# Altium PCB PCB.PcbDoc
Units mm, origin at the board's own origin, x right, y up, seen from the top; angles counter-clockwise.
Board outline 39.6 x 28 mm, 2 copper layers (Top Layer, Bottom Layer), stack 1.581 mm thick; 14 components, 13 nets, 92 pads, 24 vias.
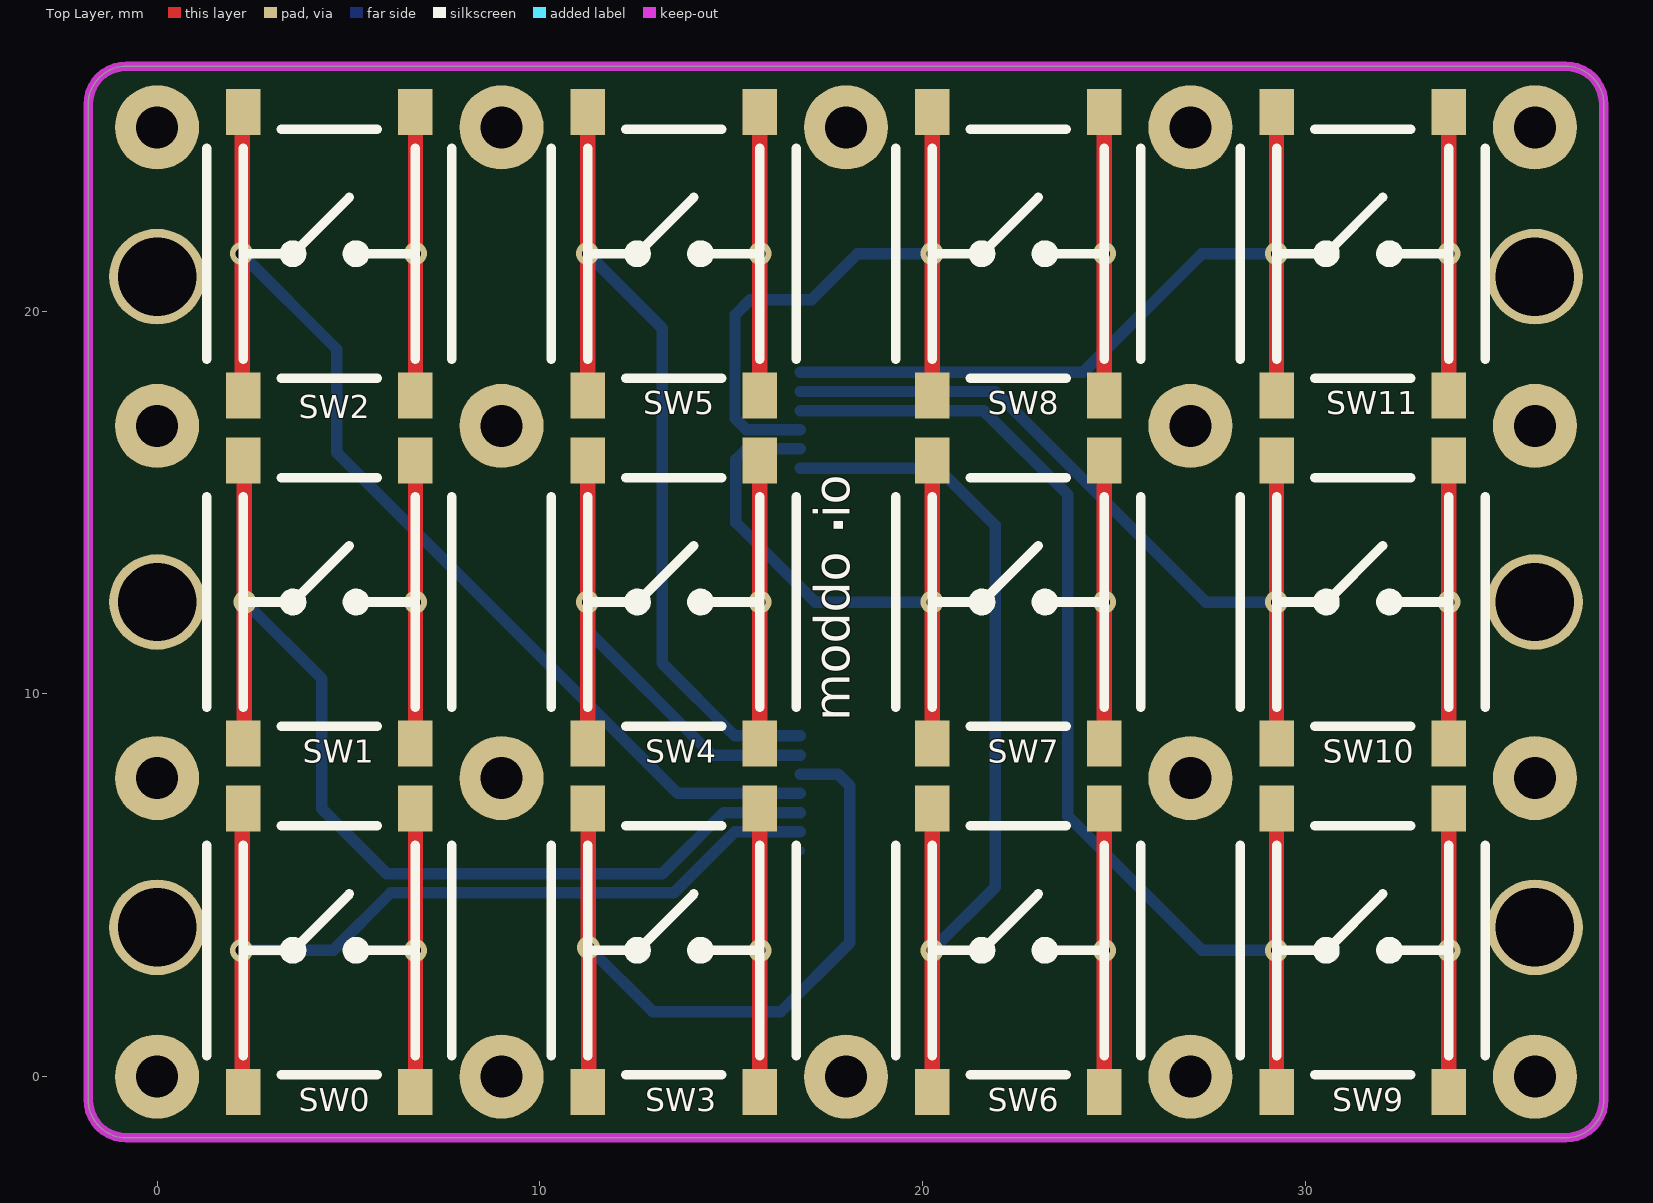
[diagram p0: Top Layer view]
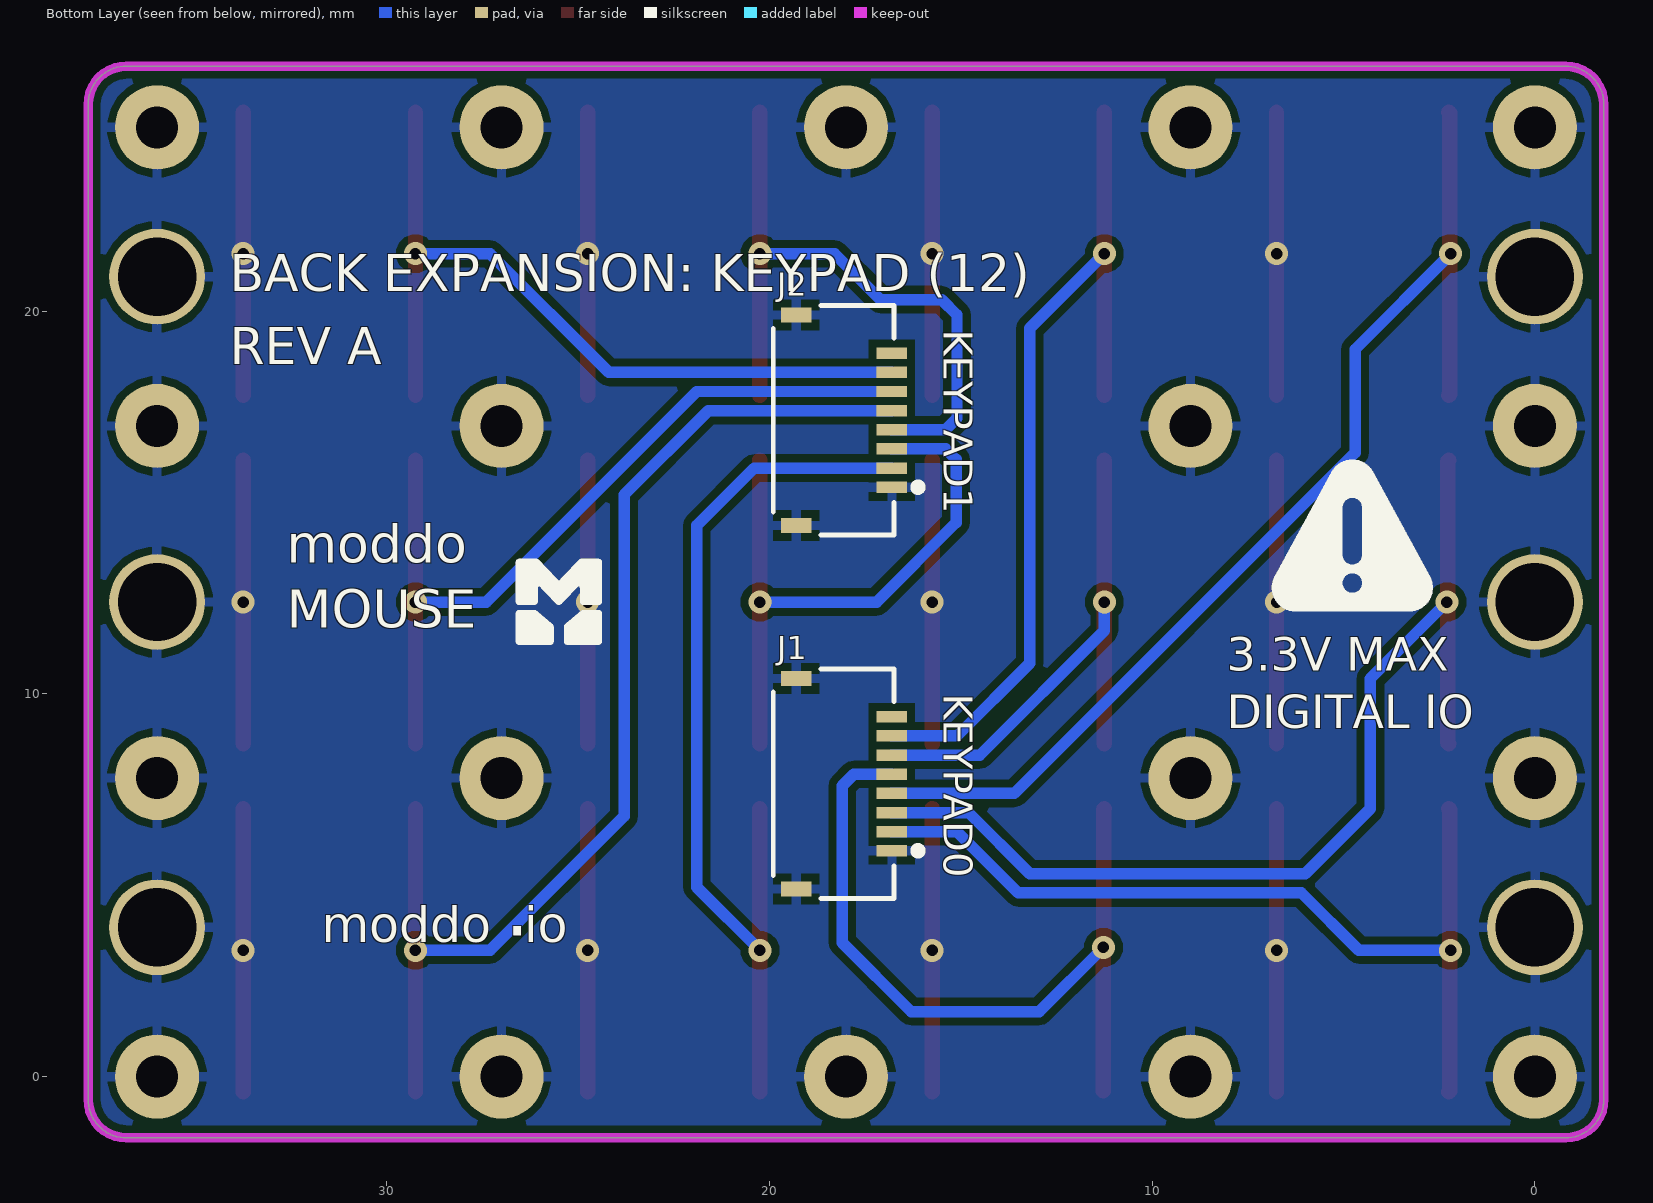
[diagram p1: Bottom Layer view, seen from below]
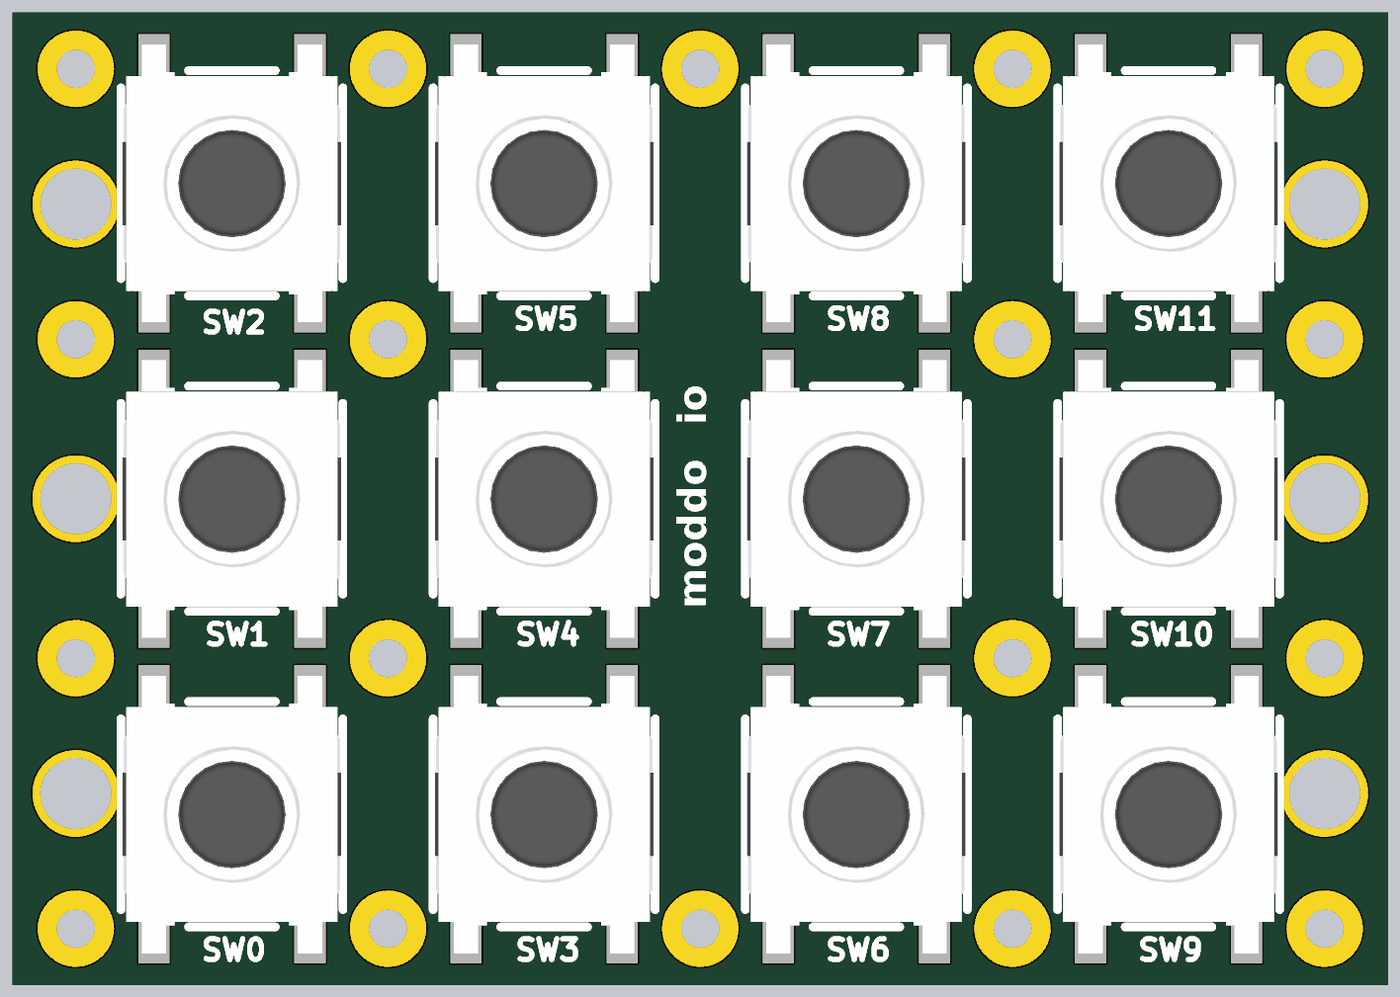
[diagram p2: 3D render of the assembled board from above, using the file's embedded part models]

## Layer stack, top to bottom
Top Solder: solder mask 0.0102, Solder Resist, Dk 3.5
Top Layer: signal copper 0.0356
Dielectric 1: dielectric 1.51, FR-4, Dk 4.8
Bottom Layer: signal copper 0.0356
Bottom Solder: solder mask 0.0102, Solder Resist, Dk 3.5

## Board outline
-1.8,-0.6 -1.8,25.4 cw(c-0.8,25.4) -0.8,26.4 36.8,26.4 cw(c36.8,25.4) 37.8,25.4 37.8,-0.6 cw(c36.8,-0.6) 36.8,-1.6 -0.8,-1.6 cw(c-0.8,-0.6)

## Design rules (kind name [scope] priority, off if disabled: settings)
BoardOutlineClearance [All] p1: gap=0.2 ignorepadtopadclearanceinfootprint=FALSE
Clearance GND_bot [InNamedPolygon('GND_bot')] p1: gap=0.2 ignorepadtopadclearanceinfootprint=FALSE
Clearance GND_top [InNamedPolygon('GND_top')] p2: gap=0.1 ignorepadtopadclearanceinfootprint=FALSE
Clearance [All] p3: gap=0.2 ignorepadtopadclearanceinfootprint=FALSE
HoleSize [All] p1: absolutevalues=TRUE maxlimit=20 minlimit=0.025 maxpercent=80.000 minpercent=20.000
MinimumSolderMaskSliver [All] p1: minsoldermaskwidth=0.05
PolygonConnect [All] p1: thpad.connectstyle=Relief thpad.reliefconductorwidth=0.254 thpad.reliefentries=4 thpad.polygonreliefangle="90 Angle" thpad.airgapwidth=0.2 smdpad.connectstyle=Relief smdpad.reliefconductorwidth=0.254 smdpad.reliefentries=4 smdpad.polygonreliefangle="90 Angle" smdpad.airgapwidth=0.2 via.connectstyle=Direct via.reliefconductorwidth=0.254 via.reliefentries=4 via.polygonreliefangle="90 Angle" via.airgapwidth=0.254
RoutingVias [All] p1: holewidth=0.3 width=0.4 viastyle="Through Hole" minholewidth=0.3 minwidth=0.4 maxholewidth=2 maxwidth=10
SilkToSilkClearance [All] p1: silktosilkclearance=0.01
SilkToSolderMaskClearance [IsPad] p1: minsilkscreentomaskgap=0.001 clearancetoexposedcopper=TRUE
SolderMaskExpansion [All] p1: expansion=0.05 istentingtop=FALSE
SupplyNets "Schematic Supply Nets_1" [InNet('GND')] p1: voltage=0.000
UnRoutedNet [All] p1: checkbadconnections=TRUE
Width [All] p1: maxlimit=2.54 minlimit=0.089 preferedwidth=0.254
25 further rules are at their usual default settings.

## Components (designator, comment, footprint, x,y, rotation, side; value= is the part's Value field where it differs from the comment)
J1 "2328702-8" 2328702-8 20.15,7.65 r270 bottom
J2 "2328702-8" 2328702-8 20.15,17.15 r270 bottom
SW0 "GT-TS090C-H031-L5" Switch_6_2mm_6_2mm_3_1mm 4.5,3.3 r90 top
SW1 "GT-TS090C-H031-L5" Switch_6_2mm_6_2mm_3_1mm 4.5,12.4 r90 top
SW2 "GT-TS090C-H031-L5" Switch_6_2mm_6_2mm_3_1mm 4.5,21.5 r90 top
SW3 "GT-TS090C-H031-L5" Switch_6_2mm_6_2mm_3_1mm 13.5,3.3 r90 top
SW4 "GT-TS090C-H031-L5" Switch_6_2mm_6_2mm_3_1mm 13.5,12.4 r90 top
SW5 "GT-TS090C-H031-L5" Switch_6_2mm_6_2mm_3_1mm 13.5,21.5 r90 top
SW6 "GT-TS090C-H031-L5" Switch_6_2mm_6_2mm_3_1mm 22.5,3.3 r90 top
SW7 "GT-TS090C-H031-L5" Switch_6_2mm_6_2mm_3_1mm 22.5,12.4 r90 top
SW8 "GT-TS090C-H031-L5" Switch_6_2mm_6_2mm_3_1mm 22.5,21.5 r90 top
SW9 "GT-TS090C-H031-L5" Switch_6_2mm_6_2mm_3_1mm 31.5,3.3 r90 top
SW10 "GT-TS090C-H031-L5" Switch_6_2mm_6_2mm_3_1mm 31.5,12.4 r90 top
SW11 "GT-TS090C-H031-L5" Switch_6_2mm_6_2mm_3_1mm 31.5,21.5 r90 top

## Footprints (in the part's own frame and the unit in brackets; to place one, negate y for a bottom-side part, rotate by r counter-clockwise, add the part's x,y. Pads: shape width x height; smd on the part's side, far side on the other; paste and mask are expansions set on the pad)
2328702-8 [mm]
  rect 0.3x0.8 smd mask+0.05: 1(1.75,3.35) 2(1.25,3.35) 3(0.75,3.35) 4(0.25,3.35) 5(-0.25,3.35) 6(-0.75,3.35) 7(-1.25,3.35) 8(-1.75,3.35)
  rect 0.4x0.8 smd mask+0.05: S1(2.75,0.85) S2(-2.75,0.85)
  silkscreen extent -3,0.25 3,4.13, body extent -3,0.25 3,4.08, height 1.06
Switch_6_2mm_6_2mm_3_1mm [mm]
  rect 1.2x0.9 smd mask+0.05: 1(-3.7,2.25) 2(3.7,2.25) 3(-3.7,-2.25) 4(3.7,-2.25)
  silkscreen extent -3.25,-3.2 3.25,3.2, body extent -4.01,-3.15 4,3.15, height 3.1

## Part data
J1 J2: "FFC/FPC Connector, 8 Contact(s), 1 Row(s), Right Angle, Solder Terminal, Natural Insulator", Actuator Color=Black, Flammability Rating="UL94 V-0", Housing Color=Natural, Manufacturer="TE Connectivity", Max Operating Temperature=85°C, Min Operating Temperature=-40°C, Operating Supply Voltage=50V, Actuator Material=Thermoplastic, Category="FFC / FPC", ComponentLink1Description=https://www.te.com/commerce/DocumentDelivery/DDEController?Action=srchrtrv&amp;DocNm=2328702&amp;DocType=Customer+Drawing&amp;DocLang=English&src-supplier=Digikey, ComponentLink1URL=https://www.te.com/commerce/DocumentDelivery/DDEController?Action=srchrtrv&amp;DocNm=2328702&amp;DocType=Customer+Drawing&amp;DocLang=English&src-supplier=Digikey, Connector System=Wire-to-Board, Contact Material="Copper Alloy", Contact Plating=Gold, Gender=Receptacle, Height=1mm, Housing Material=Thermoplastic, Length=6mm, Manufacturer Part Number=2328702-8, Mounting Technology="Surface Mount", Number of Contacts=8, Number of Positions=8, Number of Rows=1, Orientation="Right Angle", Packaging="Cut Tape", Plating=Gold, Pricing 1="28000=0.0961 (USD)", RoHS=Yes, Sealable="No (Without)", Series=-, Stock 1=56000, Supplier 1="Arrow Electronics", Supplier Part Number 1=2328702-8, Termination=Solder, Voltage Rating=50V
SW0 SW1 SW2 SW3 SW4 SW5 SW6 SW7 SW8 SW9 SW10 SW11: "Tactile Switch SPST 100gf 3.1mm SMD (SMT) Tab 6.2mm x 6.2mm Surface Mount", Manufacturer=G-Switch, Manufacturer Part Number=GT-TS090C-H031-L5

## Free pads (board coordinates)
  round 2.2 hole 1.1: ""(0,0) ""(0,7.8) ""(0,17) ""(0,24.8) ""(9,0) ""(9,7.8) ""(9,17) ""(9,24.8) ""(18,0) ""(18,24.8) ""(27,0) ""(27,7.8) ""(27,17) ""(27,24.8) ""(36,0) ""(36,7.8) ""(36,17) ""(36,24.8)
  round 2.5 hole 2.05: ""(0,3.9) ""(0,12.4) ""(0,20.9) ""(36,3.9) ""(36,12.4) ""(36,20.9)

## Via types
v1: diameter 0.6, hole 0.3, Top Layer to Bottom Layer, tented both sides, 24 vias

## Nets (pads, with @x,y where several pads share a name; then routed paths per layer and width w, separated by ;. In a path a pad name is that pad's centre, name@x,y a point inside that pad or via, vN(x,y) a via of type N, cw(c..) or ccw(c..) an arc to the next point about the centre after c; other vN are vias at no path point)
GND: J1.1 J1.S1 J1.S2 J2.1 J2.S1 J2.S2 pad. SW0.3 SW0.4 SW1.3 SW1.4 SW2.3 SW2.4 SW3.3 SW3.4 SW4.3 SW4.4 SW5.3 SW5.4 SW6.3 SW6.4 SW7.3 SW7.4 SW8.3 SW8.4 SW9.3 SW9.4 SW10.3 SW10.4 SW11.3 SW11.4 | length 88.8
  Top Layer w0.4: SW0.3 SW0.4 ; SW1.3 SW1.4 ; SW2.3 SW2.4 ; SW3.3 SW3.4 ; SW4.3 SW4.4 ; SW5.3 SW5.4 ; SW6.3 SW6.4 ; SW7.3 SW7.4 ; SW8.3 SW8.4 ; SW9.3 SW9.4 ; SW10.3 SW10.4 ; SW11.3 SW11.4
  other v1: 6.75,3.3 15.75,3.3 24.75,3.3 33.75,3.3 6.75,12.4 15.75,12.4 24.75,12.4 33.75,12.4 6.75,21.5 15.75,21.5 24.75,21.5 33.75,21.5
KEY0: J1.2 SW0.1 SW0.2 | length 23.3
  Top Layer w0.4: SW0.1 2.225,-0.375 2.225,3.275 v1(2.2,3.3) 2.225,3.325 2.225,6.975 SW0.2
  Bottom Layer w0.3: v1(2.2,3.3) 4.6,3.3 6.1,4.8 13.5,4.8 15.1,6.4 J1.2
KEY1: J1.3 SW1.1 SW1.2 | length 27.5
  Top Layer w0.4: SW1.1 2.275,8.725 2.275,12.375 v1(2.3,12.4) 2.275,12.425 2.275,16.075 SW1.2
  Bottom Layer w0.3: v1(2.3,12.4) 4.3,10.4 4.3,7 6,5.3 13.2,5.3 14.8,6.9 J1.3
KEY2: J1.4 SW2.1 SW2.2 | length 29.5
  Top Layer w0.4: SW2.1 2.225,17.825 2.225,21.475 v1(2.2,21.5) 2.225,21.525 2.225,25.175 SW2.2
  Bottom Layer w0.3: v1(2.2,21.5) 4.7,19 4.7,16.3 13.6,7.4 J1.4
KEY3: J1.5 SW3.1 SW3.2 | length 21.2
  Top Layer w0.4: SW3.2 11.263,6.987 11.263,3.388 v1(11.275,3.375) SW3.1@11.275,-0.375
  Bottom Layer w0.3: v1@11.3,3.4 v1(11.275,3.375) 12.95,1.7 16.3,1.7 18.1,3.5 18.1,7.6 17.8,7.9 J1.5
KEY4: J1.6 SW4.1 SW4.2 | length 15
  Top Layer w0.4: SW4.1 v1(11.25,12.4) SW4.2
  Bottom Layer w0.3: v1(11.25,12.4) 11.25,11.65 14.5,8.4 J1.6
KEY5: J1.7 SW5.1 SW5.2 | length 23.3
  Top Layer w0.4: SW5.1 v1(11.25,21.5) SW5.2
  Bottom Layer w0.3: v1(11.25,21.5) 13.2,19.55 13.2,10.8 15.1,8.9 J1.7
KEY6: J2.2 SW6.1 SW6.2 | length 24.9
  Top Layer w0.4: SW6.1 v1(20.25,3.3) SW6.2
  Bottom Layer w0.3: J2.2 20.4,15.9 21.9,14.4 21.9,4.95 v1(20.25,3.3)
KEY7: J2.3 SW7.1 SW7.2 | length 16.8
  Top Layer w0.4: SW7.1 v1(20.25,12.4) SW7.2
  Bottom Layer w0.3: J2.3 15.4,16.4 15.124,16.124 15.124,14.476 17.2,12.4 v1(20.25,12.4)
KEY8: J2.4 SW8.1 SW8.2 | length 17.7
  Top Layer w0.4: SW8.1 v1(20.25,21.5) SW8.2
  Bottom Layer w0.3: J2.4 15.4,16.9 15.1,17.2 15.1,19.9 15.5,20.3 17.1,20.3 18.3,21.5 v1(20.25,21.5)
KEY9: J2.5 SW9.1 SW9.2 | length 30.6
  Top Layer w0.4: SW9.1 v1(29.25,3.3) SW9.2
  Bottom Layer w0.3: J2.5 21.6,17.4 23.8,15.2 23.8,6.8 27.3,3.3 v1(29.25,3.3)
KEY10: J2.6 SW10.1 SW10.2 | length 22.1
  Top Layer w0.4: SW10.1 v1(29.25,12.4) SW10.2
  Bottom Layer w0.3: J2.6 21.9,17.9 27.4,12.4 v1(29.25,12.4)
KEY11: J2.7 SW11.1 SW11.2 | length 21.1
  Top Layer w0.4: SW11.1 v1(29.25,21.5) SW11.2
  Bottom Layer w0.3: J2.7 24.2,18.4 27.3,21.5 v1(29.25,21.5)
pads on no net: J1.8 J2.8

## Polygon pours and split planes (outlines as drawn)
GND on Bottom Layer "GND_L02_P001" (solid, pour order 1): -1.8,-0.6 -1.8,25.4 cw(c-0.8,25.4) -0.8,26.4 36.8,26.4 cw(c36.8,25.4) 37.8,25.4 37.8,-0.6 cw(c36.8,-0.6) 36.8,-1.6 -0.8,-1.6 cw(c-0.8,-0.6)

## Keep-outs
Keep-Out Layer:
  the board outline again, w0.254

## Silkscreen, mask and mechanical layers (free items; w line width, h text height)
Top Overlay:
  text "io" at 18.414,14.589 h1.6 r90
  text "." at 18.414,14.089 h2.5 r90
  text "moddo" at 18.414,9.289 h1.6 r90
Bottom Overlay:
  drawing of 4 lines, arcs and shapes, not listed
  text "BACK EXPANSION: KEYPAD (12)" at 34.1,20.2 h1.65
  text "KEYPAD1" at 15.7,19.507 h1.3 r90
  text "REV A" at 34.1,18.3 h1.65
  text "moddo / MOUSE" at 32.618,11.396 h1.7
  text "KEYPAD0" at 15.7,10.007 h1.3 r90
  text "3.3V MAX / DIGITAL IO" at 8.05,8.82 h1.5
  text "io" at 26.4,3.2 h1.6
  text "." at 26.9,3.2 h2.5
  text "moddo" at 31.7,3.2 h1.6